# Altium PCB BOARD.PcbDoc (part 1 of 2)
Units mm, origin at the board's own origin, x right, y up, seen from the top; angles counter-clockwise.
Board outline 55 x 60 mm, 2 copper layers (Top Layer, Bottom Layer), stack 1.18 mm thick; 81 components, 77 nets, 348 pads, 271 vias.
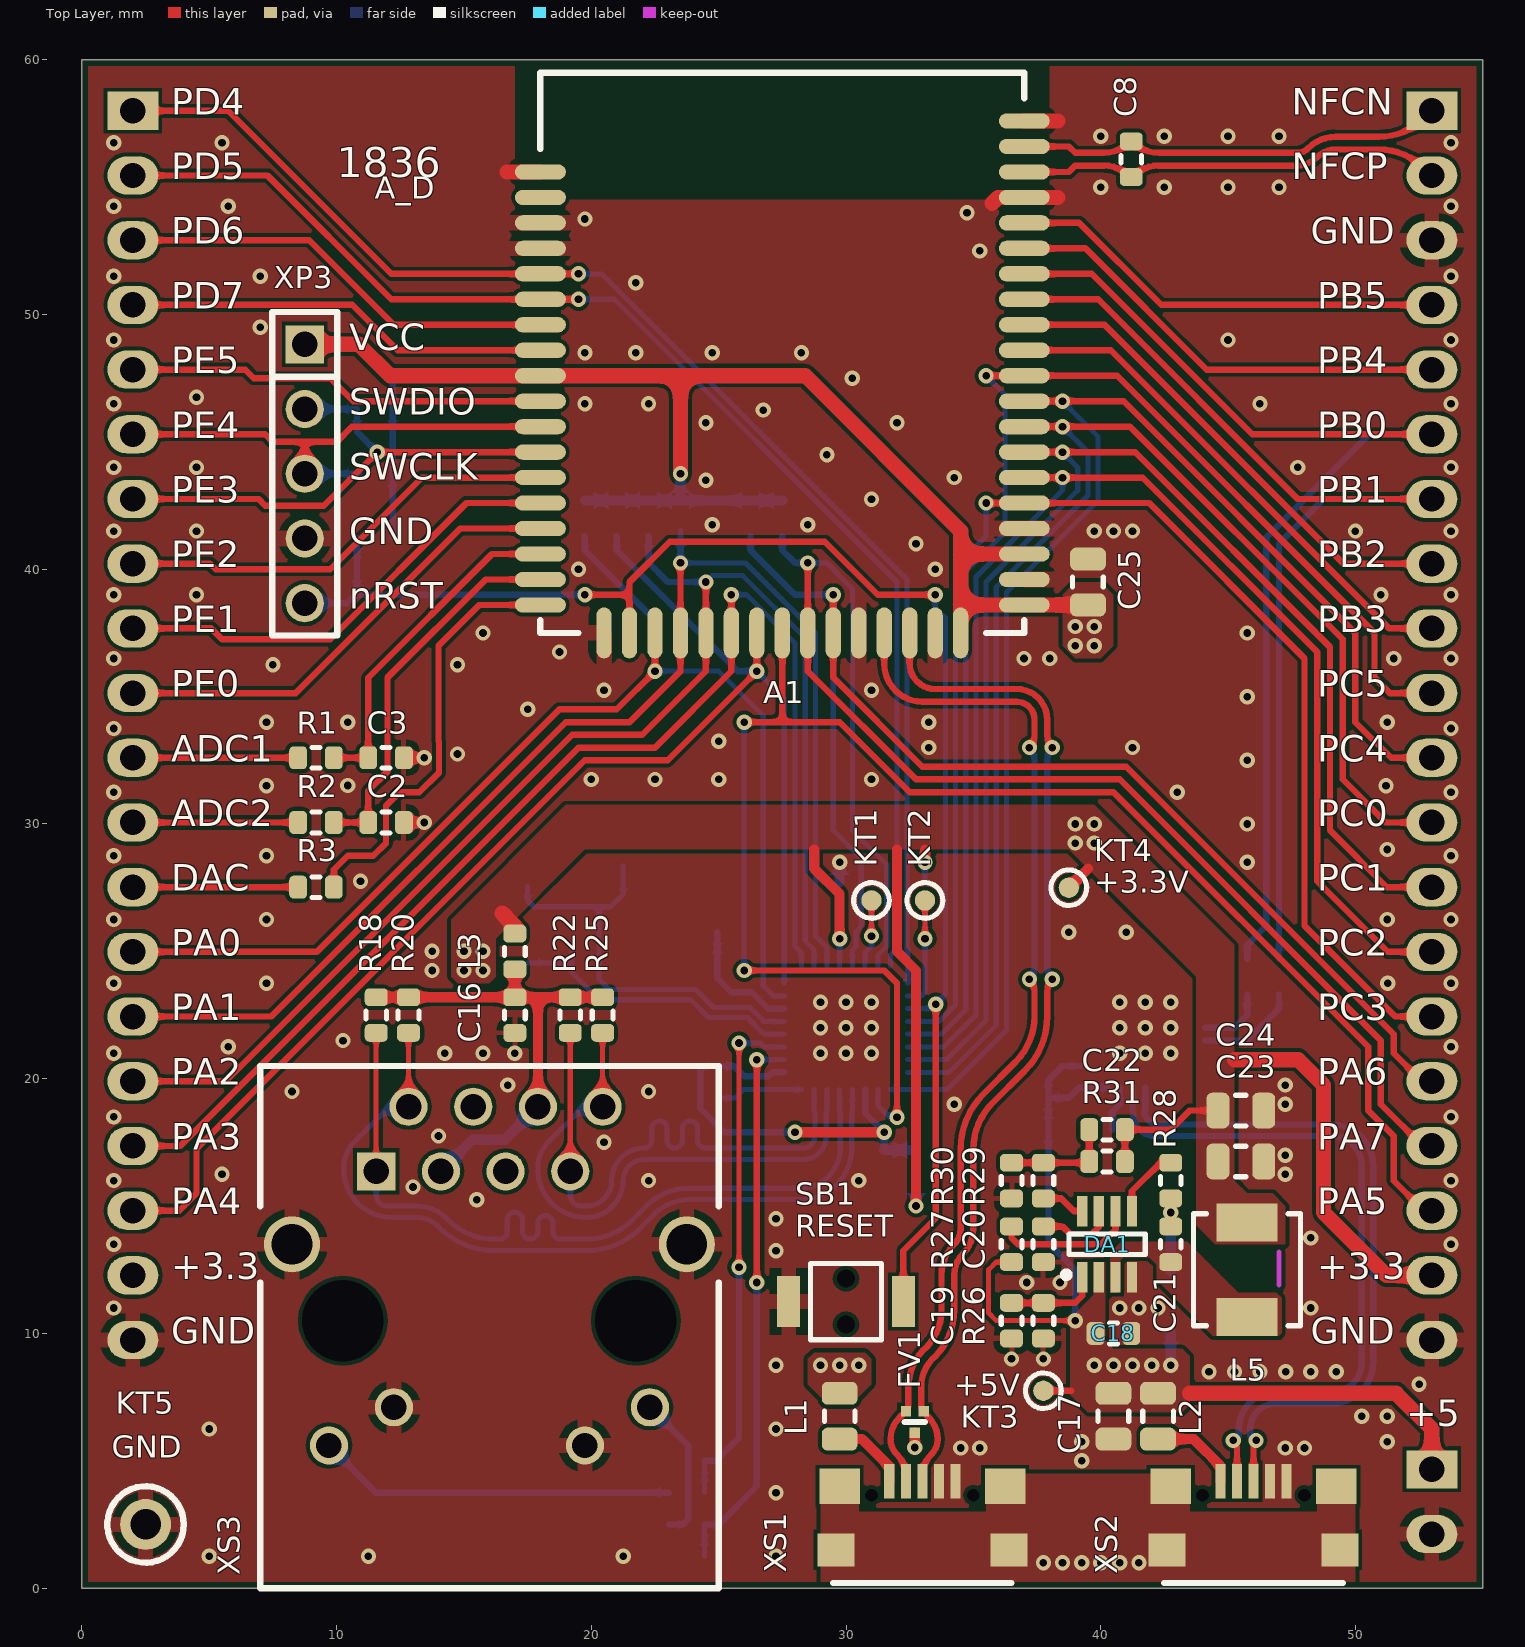
[diagram p0: Top Layer view]
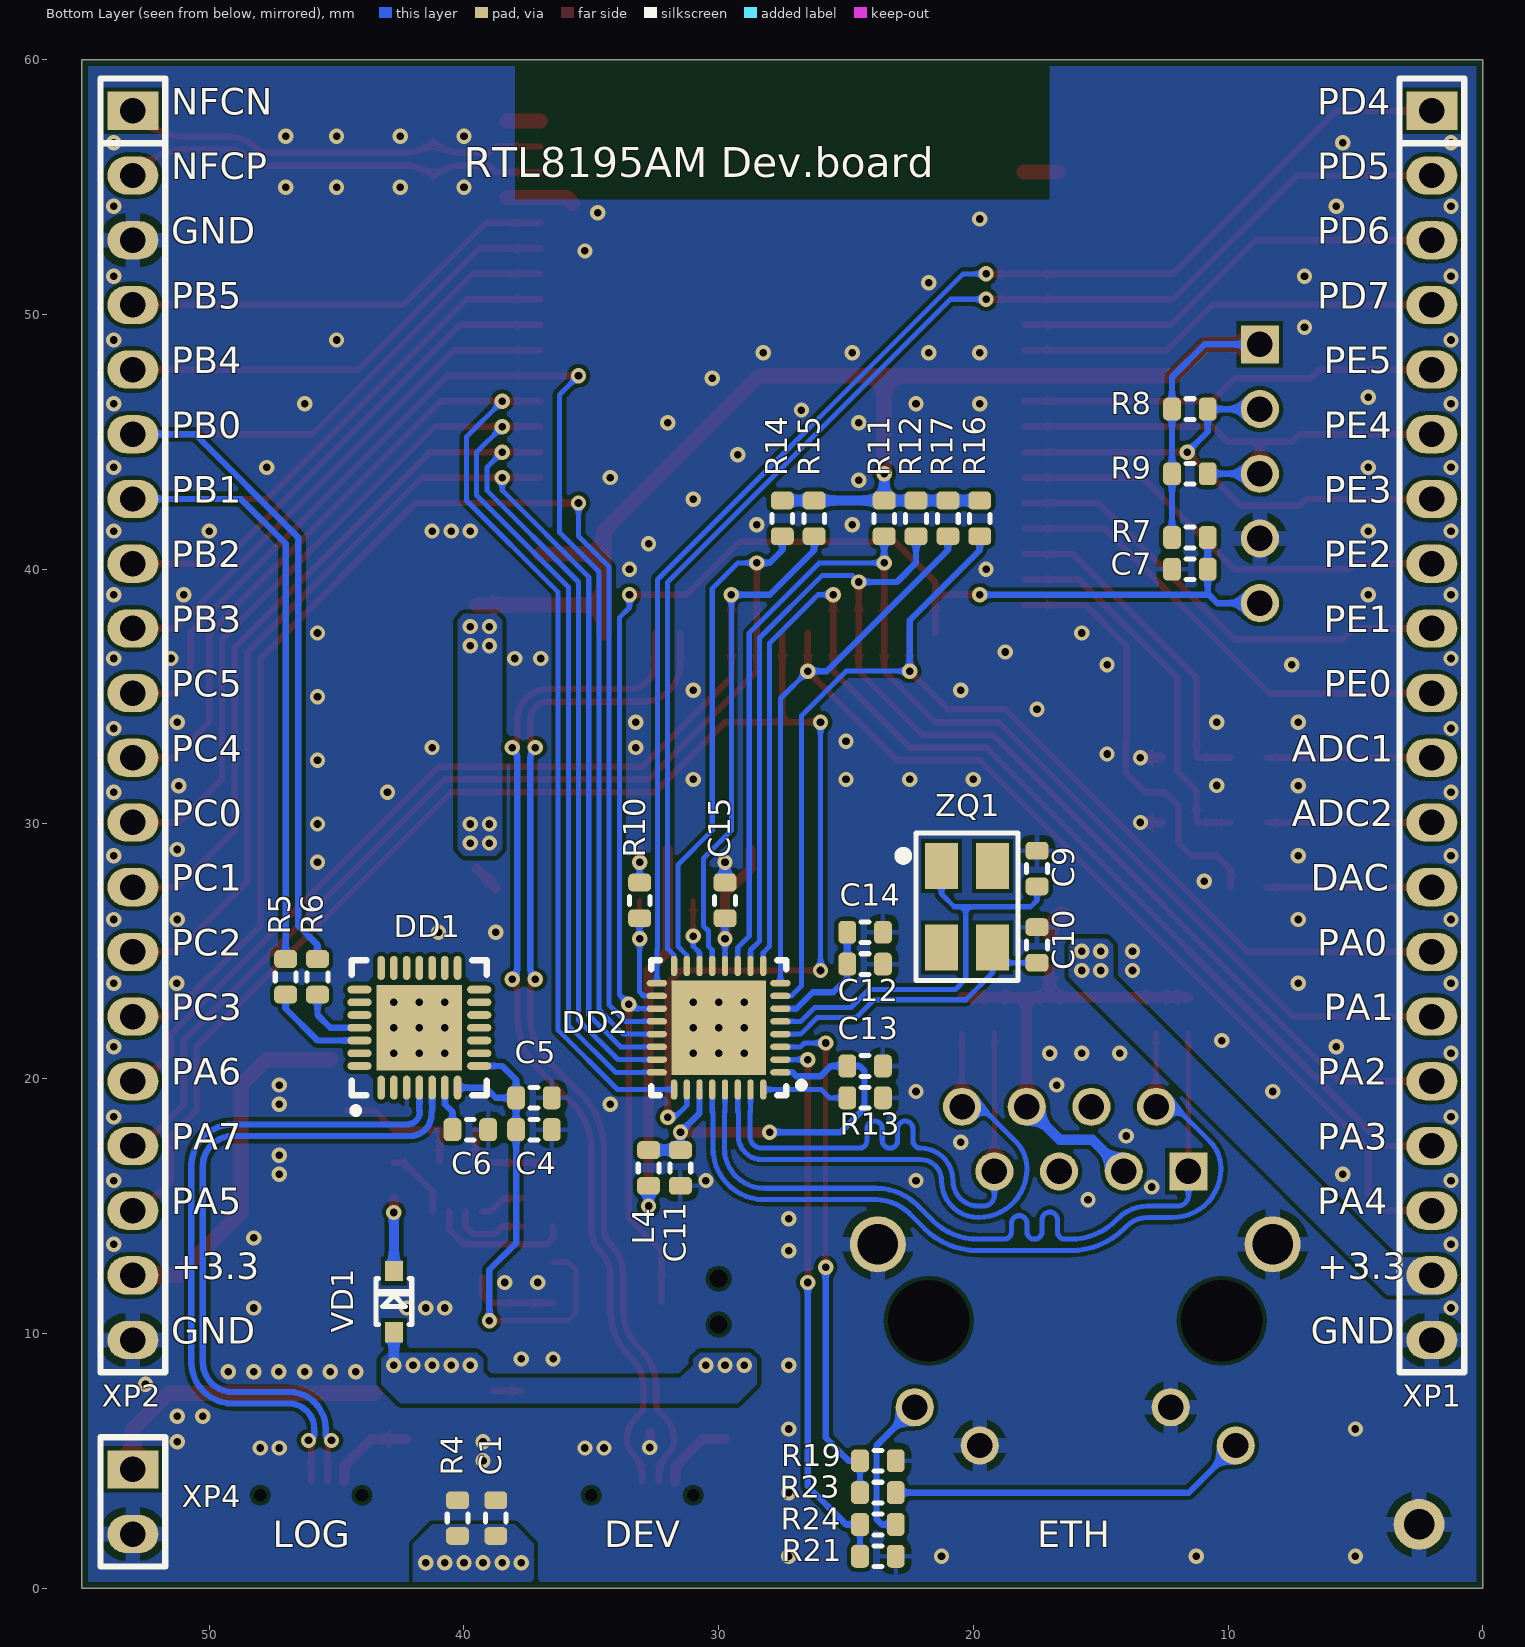
[diagram p1: Bottom Layer view, seen from below]

## Layer stack, top to bottom
Top Solder: solder mask 0.01, Solder Resist, Dk 3.5
Top Layer: signal copper 0.03
Dielectric1: core 1.12, FR-4, Dk 4.2
Bottom Layer: signal copper 0.03
Bottom Solder: solder mask 0.01, Solder Resist, Dk 3.5

## Board outline
0,0 55,0 55,60 0,60

## Design rules (kind name [scope] priority, off if disabled: settings)
BoardOutlineClearance [All] p1: gap=0.25 ignorepadtopadclearanceinfootprint=FALSE
Clearance [All] p1: gap=0.152 ignorepadtopadclearanceinfootprint=FALSE
ComponentClearance [All] p1 off: gap=0.25 collisioncheckmode=3 verticalgap=0.25 showdistances=FALSE
DiffPairsRouting [All] p1: maxlimit=0.4 minlimit=0.15 mostfreqgap=0.25 toplayer_minwidth=0.2 toplayer_maxwidth=0.4 toplayer_prefwidth=0.25 bottomlayer_minwidth=0.2 bottomlayer_maxwidth=0.4 bottomlayer_prefwidth=0.25 maxuncoupledlength=12
Height [All] p1: minheight=0 maxheight=25 prefheight=25
HoleSize [All] p1: absolutevalues=TRUE maxlimit=6 minlimit=0.3 maxpercent=80.000 minpercent=20.000
HoleToHoleClearance [All] p1: gap=0.25 allowstackedmicrovias=TRUE
MatchedLengths "Schematic Matched Net Lengths_6" [InNetClass('SMI')] p1: tolerance=2 checknetsindiffpair=FALSE checkdiffpairvsdiffpair=TRUE checkxsignals=TRUE checkothers=TRUE
MatchedLengths "Schematic Matched Net Lengths_5" [InNetClass('MII')] p2: tolerance=2 checknetsindiffpair=FALSE checkdiffpairvsdiffpair=TRUE checkxsignals=TRUE checkothers=TRUE
MatchedLengths "Schematic Matched Net Lengths_4" [InNetClass('ETH')] p3: tolerance=2 checknetsindiffpair=FALSE checkdiffpairvsdiffpair=TRUE checkxsignals=TRUE checkothers=TRUE
MatchedLengths "Schematic Matched Net Lengths_3" [InNetClass('USBD')] p4: tolerance=1 checknetsindiffpair=TRUE checkdiffpairvsdiffpair=FALSE checkxsignals=FALSE checkothers=FALSE
MatchedLengths "Schematic Matched Net Lengths_2" [InNetClass('USB')] p5: tolerance=1 checknetsindiffpair=TRUE checkdiffpairvsdiffpair=FALSE checkxsignals=FALSE checkothers=FALSE
MatchedLengths "Schematic Matched Net Lengths_1" [InNetClass('NFC')] p6: tolerance=1 checknetsindiffpair=TRUE checkdiffpairvsdiffpair=FALSE checkxsignals=FALSE checkothers=FALSE
MatchedLengths "Schematic Matched Net Lengths" [InNetClass('ETH')] p7: tolerance=1 checknetsindiffpair=TRUE checkdiffpairvsdiffpair=FALSE checkxsignals=FALSE checkothers=FALSE
MinimumSolderMaskSliver [All] p1 off: minsoldermaskwidth=0.254
PlaneClearance [All] p1: clearance=0.5
PlaneConnect [All] p1: planeconnectstyle=Relief reliefexpansion=0.5 reliefentries=4 reliefconductorwidth=0.25 reliefairgap=0.25
PolygonConnect "Schematic Polygon Connect Style_3" [InNet('VCC3P3')] p1: connectstyle=Direct reliefconductorwidth=0.254 reliefentries=4 polygonreliefangle="45 Angle" airgapwidth=0.254
PolygonConnect "Schematic Polygon Connect Style" [InNet('NetC21_2')] p2: connectstyle=Direct reliefconductorwidth=0.254 reliefentries=4 polygonreliefangle="45 Angle" airgapwidth=0.254
PolygonConnect "Schematic Polygon Connect Style_1" [InNet('EARTH')] p3: connectstyle=Direct reliefconductorwidth=0.254 reliefentries=4 polygonreliefangle="45 Angle" airgapwidth=0.254
PolygonConnect PolygonConnect_DirectConnect [InComponentClass('DirectConnect')] p4: connectstyle=Direct reliefconductorwidth=0.254 reliefentries=4 polygonreliefangle="90 Angle" airgapwidth=0.254
PolygonConnect PolygonConnect_Components [InComponent('C*') OR InComponent('R*') OR InComponent('NR*') OR InComponent('DA*') OR InComponent('DD*') OR InComponent('HL*')] p5: connectstyle=Relief reliefconductorwidth=0.2 reliefentries=4 polygonreliefangle="90 Angle" airgapwidth=0.25
PolygonConnect PolygonConnect_Connectors [All vs (InPadClass('All Pads'))] p6: connectstyle=Relief reliefconductorwidth=0.6 reliefentries=4 polygonreliefangle="90 Angle" airgapwidth=0.3
PolygonConnect PolygonConnect_Via [All] p7: connectstyle=Direct reliefconductorwidth=0.254 reliefentries=4 polygonreliefangle="90 Angle" airgapwidth=0.254
RoutingCorners [All] p1: cornerstyle=45-Degree minsetback=1.5 maxsetback=3.5
RoutingVias [All] p1: holewidth=0.6 width=1.2 viastyle="Through Hole" minholewidth=0.3 minwidth=0.6 maxholewidth=1 maxwidth=2
SMDEntry [All] p1: side=TRUE corner=TRUE anyangle=TRUE
SilkToSilkClearance [All] p1 off: silktosilkclearance=0.254
SilkToSolderMaskClearance [IsPad] p1 off: minsilkscreentomaskgap=0.254 clearancetoexposedcopper=TRUE
SolderMaskExpansion [All] p1: expansion=0.1
Width [All] p1: maxlimit=8 minlimit=0.2 preferedwidth=0.6
Width Width_TrackEnds [All] p2 off: maxlimit=0.25 minlimit=0.25 preferedwidth=0.25 checkconnectedcopper=TRUE
19 further rules are at their usual default settings.

## Classes and differential pairs
component class DirectConnect: C1 C17 C18 C23 C24 C25 DA1 L1 L2 L5 R4 XS1 XS2
net class USB: USB_N USB_P
net class USBD: USBD_N USBD_P
net class SMI: PD4 PD5
net class NFC: NFC_N NFC_P
net class MII: ETH_CRS ETH_nINT PA0 PA1 PA2 PA3 PA4 PA5 PA6 PA7 PC0 PC1 PC2 PC3 PC4 PC5
net class ETH: RX_N RX_P TX_N TX_P
differential pair TX: +TX_P -TX_N
differential pair RX: +RX_P -RX_N
differential pair USBD: +USBD_P -USBD_N
differential pair USB: +USB_P -USB_N
differential pair NFC: +NFC_P -NFC_N

## Components (designator, comment, footprint, x,y, rotation, side; value= is the part's Value field where it differs from the comment)
A1 "AMB-02" AMB-02 27.5,48 r0 top locked value=MJIOT-AMB-02
C1 "Capacitor" C0603_L 38.75,2.75 r270 bottom value=0.1uF
C2 "Capacitor" C0603_L 11.941,30.06 r180 top value=100pF
C3 "Capacitor" C0603_L 11.941,32.6 r180 top value=100pF
C4 "Capacitor" C0603_L 37.25,18 r0 bottom value=1uF
C5 "Capacitor" C0603_L 37.25,19.25 r0 bottom value=0.1uF
C6 "Capacitor" C0603_L 39.75,18 r0 bottom value=0.1uF
C7 "Capacitor" C0603_L 11.5,40 r180 bottom value=0.1uF
C8 "Capacitor" C0603_L 41.2,56.1 r90 top value=8.2pF
C9 "Capacitor" C0603_L 17.5,28.25 r270 bottom value=12pF
C10 "Capacitor" C0603_L 17.5,25.25 r270 bottom value=12pF
C11 "Capacitor" C0603_L 31.5,16.5 r90 bottom value=0.1uF
C12 "Capacitor" C0603_L 24.25,24.5 r0 bottom value=1uF
C13 "Capacitor" C0603_L 24.25,20.5 r0 bottom value=0.1uF
C14 "Capacitor" C0603_L 24.25,25.75 r0 bottom value=470pF
C15 "Capacitor" C0603_L 29.75,27 r270 bottom value=0.1uF
C16 "Capacitor" C0603_L 17,22.498 r270 top value=0.1uF
C17 "Capacitor" C0805_L 40.5,6.75 r90 top value=22uF
C18 "Capacitor" C0603_L 40.5,10 r180 top value=0.1uF
C19 "Capacitor" C0603_L 36.5,10.5 r90 top value=1000pF
C20 "Capacitor" C0603_L 37.75,13.5 r90 top value=0.1uF
C21 "Capacitor" C0603_L 42.75,13.5 r270 top value=0.1uF
C22 "Capacitor" C0603_L 40.25,18 r0 top value=33pF
C23 "Capacitor" C0805_L 45.5,16.75 r180 top value=22uF
C24 "Capacitor" C0805_L 45.5,18.75 r180 top value=22uF
C25 "Capacitor" C0805_L 39.5,39.5 r270 top value=22uF
DA1 "MP2315GJ" TSOT-23-8_065P290X160X100_N 40.25,13.5 r0 top locked value=MP2315GJ-Z
DD1 "CP2102_9" QFN-28_050P500X500X100_N 41.75,22 r90 bottom locked value=CP2102-GM
DD2 "LAN8710A-Series" QFN-32_050P500X500X085_N 30,22 r0 bottom locked value=LAN8710A-EZC
FV1 "TPD2EUSB30DRT" SOT-3_070P100X080X050_N 32.7,6.522 r180 top
KT1 "Text" TP-SMT-C-0.8mm 31,27 r0 top value=TestPoint-SMT
KT2 "Text" TP-SMT-C-0.8mm 33.1,27 r90 top value=TestPoint-SMT
KT3 "+5V" TP-SMT-C-0.8mm 37.75,7.75 r90 top value=TestPoint-SMT
KT4 "+3.3V" TP-SMT-C-0.8mm 38.75,27.5 r90 top value=TestPoint-SMT
KT5 "GND" 5001 2.5,2.5 r0 top locked value=5001
L1 "FerriteBead" L0805_L 29.75,6.75 r90 top value=BLM21PG331SN1
L2 "FerriteBead" L0805_L 42.25,6.75 r90 top value=BLM21PG331SN1
L3 "FerriteBead" L0603_L 17,25 r270 top value=BLM18PG331SN1
L4 "FerriteBead" L0603_L 32.75,16.5 r270 bottom value=BLM18PG331SN1
L5 "Coil" SRP4020TA-Series 45.75,12.5 r90 top value=SRP4020TA-4R7M
R1 "Resistor" R0603_L 9.191,32.6 r0 top value=100
R2 "Resistor" R0603_L 9.191,30.06 r0 top value=100
R3 "Resistor" R0603_L 9.191,27.52 r0 top value=0
R4 "Resistor" R0603_L 40.25,2.75 r90 bottom value=100k
R5 "Resistor" R0603_L 47,24 r90 bottom value=1k
R6 "Resistor" R0603_L 45.75,24 r90 bottom value=1k
R7 "Resistor" R0603_L 11.5,41.25 r0 bottom value=10k
R8 "Resistor" R0603_L 11.5,46.29 r0 bottom value=10k
R9 "Resistor" R0603_L 11.5,43.75 r0 bottom value=10k
R10 "Resistor" R0603_L 33.1,27 r90 bottom value=10k
R11 "Resistor" R0603_L 23.5,42 r90 bottom value=10k
R12 "Resistor" R0603_L 22.25,42 r90 bottom value=10k
R13 "Resistor" R0603_L 24.25,19.25 r0 bottom value=12k
R14 "Resistor" R0603_L 27.5,42 r90 bottom value=10k
R15 "Resistor" R0603_L 26.25,42 r90 bottom value=10k
R16 "Resistor" R0603_L 19.75,42 r90 bottom value=10k
R17 "Resistor" R0603_L 21,42 r90 bottom value=10k
R18 "Resistor" R0603_L 11.555,22.5 r90 top value=49.9
R19 "Resistor" R0603_L 23.75,5 r0 bottom value=10k
R20 "Resistor" R0603_L 12.825,22.5 r90 top value=49.9
R21 "Resistor" R0603_L 23.75,1.25 r0 bottom value=10k
R22 "Resistor" R0603_L 19.175,22.5 r90 top value=49.9
R23 "Resistor" R0603_L 23.75,3.75 r180 bottom value=270
R24 "Resistor" R0603_L 23.75,2.5 r180 bottom value=270
R25 "Resistor" R0603_L 20.445,22.5 r90 top value=49.9
R26 "Resistor" R0603_L 37.75,10.5 r90 top value=63.4k
R27 "Resistor" R0603_L 36.5,13.5 r90 top value=100k
R28 "Resistor" R0603_L 42.75,16 r270 top value=20
R29 "Resistor" R0603_L 37.75,16 r90 top value=33k
R30 "Resistor" R0603_L 36.5,16 r90 top value=12.7k
R31 "Resistor" R0603_L 40.25,16.75 r0 top value=40.2k
SB1 "RESET" IT-1185AP 30,11.25 r270 top locked value=IT-1185AP
VD1 "Diode" SOD-323 42.75,11.25 r90 bottom value=1N4148WS-7-F
XP1 "Text" PLS-20 2,33.87 r270 bottom locked value=PLS-20
XP2 "Text" PLS-20 53,33.87 r270 bottom locked value=PLS-20
XP3 "Text" PLS-5 8.75,43.75 r270 top value=PLS-5
XP4 "Text" PLS-2 53,3.39 r270 bottom locked value=PLS-2
XS1 "Text" 1981568-1 33,1.75 r0 top locked value=1981568-1
XS2 "Text" 1981568-1 46,1.75 r0 top locked value=1981568-1
XS3 "Text" SK02-111006NL 16,10 r0 top locked value=SK02-111006NL
ZQ1 "Crystal" "SMD 5x3.2mm" 20.25,26.75 r270 bottom value=AB-25.000MAGE-T

## Footprints (in the part's own frame and the unit in brackets; to place one, negate y for a bottom-side part, rotate by r counter-clockwise, add the part's x,y. Pads: shape width x height; smd on the part's side, far side on the other; paste and mask are expansions set on the pad)
5001 [mm] "Keystone Test Point"
  round 2 hole 1.2: 1(0,0)
  silkscreen extent -1.5,-1.5 1.5,1.5, body extent -1.27,-1.27 1.27,1.27, height 4.9
1981568-1 [mm]
  round 0 hole 0.5 unplated: 0(-2,1.9) 0(2,1.9)
  rect 0.4x1.35 smd: 1(-1.3,2.45) 2(-0.65,2.45) 3(0,2.45) 4(0.65,2.45) 5(1.3,2.45)
  rect 1.45x1.3 smd: 6(-3.4,-0.25) 6(3.4,-0.25)
  rect 1.6x1.4 smd: 6(-3.25,2.25) 6(3.25,2.25)
  silkscreen extent -3.5,-1.55 3.5,-1.55, body extent -4,-2.95 4,2.65, height 2.79
AMB-02 [mm] "Wi-Fi Module on RTL8195AM"
  oval 2x0.6 smd: 1(-9.5,7.6) 2(-9.5,6.6) 3(-9.5,5.6) 4(-9.5,4.6) 5(-9.5,3.6) 6(-9.5,2.6) 7(-9.5,1.6) 8(-9.5,0.6) 9(-9.5,-0.4) 10(-9.5,-1.4) 11(-9.5,-2.4) 12(-9.5,-3.4) 13(-9.5,-4.4) 14(-9.5,-5.4) 15(-9.5,-6.4) 16(-9.5,-7.4) 17(-9.5,-8.4) 18(-9.5,-9.4) 34(9.5,-9.4) 35(9.5,-8.4) 36(9.5,-7.4) 37(9.5,-6.4) 38(9.5,-5.4) 39(9.5,-4.4) 40(9.5,-3.4) 41(9.5,-2.4) 42(9.5,-1.4) 43(9.5,-0.4) 44(9.5,0.6) 45(9.5,1.6) 46(9.5,2.6) 47(9.5,3.6) 48(9.5,4.6) 49(9.5,5.6) 50(9.5,6.6) 51(9.5,7.6) 52(9.5,8.6) 53(9.5,9.6)
  oval 0.6x2 smd: 19(-7,-10.5) 20(-6,-10.5) 21(-5,-10.5) 22(-4,-10.5) 23(-3,-10.5) 24(-2,-10.5) 25(-1,-10.5) 26(0,-10.5) 27(1,-10.5) 28(2,-10.5) 29(3,-10.5) 30(4,-10.5) 31(5,-10.5) 32(6,-10.5) 33(7,-10.5)
  Top Layer pour cut-out: 10.5,6.5 10.5,12 -10.5,12 -10.5,6.5
  Bottom Layer pour cut-out: 10.5,6.5 10.5,12 -10.5,12 -10.5,6.5
  silkscreen extent -9.5,-10.5 9.5,11.5, body extent -9.5,-10.5 9.5,11.5, height 0.8
C0603_L [mm] "Chip Capacitor; Body 1.6 x 0.8 mm (LxW typ)"
  rrect50% 0.7x0.9 smd: 1(-0.7,0) 2(0.7,0)
  silkscreen extent -0.15,-0.41 0.15,0.41, body extent -0.8,-0.4 0.8,0.4, height 0.91
C0805_L [mm] "Chip Capacitor; Body 2.0 x 1.2 mm (LxW typ)"
  rrect50% 0.9x1.4 smd: 1(-0.9,0) 2(0.9,0)
  silkscreen extent -0.2,-0.6 0.2,0.6, body extent -1,-0.62 1,0.63, height 1.01
IT-1185AP [mm]
  rect 2x0.9 smd: 1(0,2.25) 2(0,-2.25)
  round 0.1 hole 0.7 unplated: 4(-0.9,0) 4(0.9,0)
  silkscreen extent -1.5,-1.4 1.5,1.4, body extent -1.45,-2.45 1.45,2.45, height 2.04
L0603_L [mm] "Chip Coil; Body 1.6 x 0.8 mm (LxW typ)"
  rrect50% 0.7x0.9 smd: 1(-0.7,0) 2(0.7,0)
  silkscreen extent -0.15,-0.41 0.15,0.41, body extent -0.8,-0.48 0.8,0.47, height 0.8
L0805_L [mm] "Chip Coil; Body 2.0 x 1.2 mm (LxW typ)"
  rrect50% 0.9x1.4 smd: 1(-0.9,0) 2(0.9,0)
  silkscreen extent -0.2,-0.6 0.2,0.6, body extent -0.97,-0.65 1.03,0.65, height 1.2
PLS-2 [mm]
  rect 1.5x2 hole 1: 1(-1.27,0)
  oval 1.5x2 hole 1: 2(1.27,0)
  silkscreen extent -2.54,-1.27 2.54,1.27, body extent -2.54,-1.27 2.54,1.27, height 8.9
PLS-5 [mm]
  rect 1.5x1.5 hole 1: 1(-5.08,0)
  round 1.5 hole 1: 2(-2.54,0) 3(0,0) 4(2.54,0) 5(5.08,0)
  silkscreen extent -6.35,-1.27 6.35,1.27, body extent -6.35,-1.27 6.35,1.27, height 8.9
PLS-20 [mm]
  rect 1.5x2 hole 1: 1(-24.13,0)
  oval 1.5x2 hole 1: 2(-21.59,0) 3(-19.05,0) 4(-16.51,0) 5(-13.97,0) 6(-11.43,0) 7(-8.89,0) 8(-6.35,0) 9(-3.81,0) 10(-1.27,0) 11(1.27,0) 12(3.81,0) 13(6.35,0) 14(8.89,0) 15(11.43,0) 16(13.97,0) 17(16.51,0) 18(19.05,0) 19(21.59,0) 20(24.13,0)
  silkscreen extent -25.4,-1.27 25.4,1.27, body extent -25.4,-1.27 25.4,1.27, height 8.9
QFN-28_050P500X500X100_N [mm] "QFN, 28-Leads, Body 5,00x5,00mm, Pitch 0,50mm, Thermal Pad 3,35x3,35mm, IPC Medium Density"
  oval 0.95x0.3 smd: 1(-2.35,1.5) 2(-2.35,1) 3(-2.35,0.5) 4(-2.35,0) 5(-2.35,-0.5) 6(-2.35,-1) 7(-2.35,-1.5) 15(2.35,-1.5) 16(2.35,-1) 17(2.35,-0.5) 18(2.35,0) 19(2.35,0.5) 20(2.35,1) 21(2.35,1.5)
  oval 0.3x0.95 smd: 8(-1.5,-2.35) 9(-1,-2.35) 10(-0.5,-2.35) 11(0,-2.35) 12(0.5,-2.35) 13(1,-2.35) 14(1.5,-2.35) 22(1.5,2.35) 23(1,2.35) 24(0.5,2.35) 25(0,2.35) 26(-0.5,2.35) 27(-1,2.35) 28(-1.5,2.35)
  rect 3.35x3.35 smd: TP(0,0)
  silkscreen extent -3.37,-2.65 2.65,2.65, body extent -2.55,-2.55 2.55,2.55, height 1
QFN-32_050P500X500X085_N [mm] "QFN, 32-Leads, Body 5,00x5,00mm, Pitch 0,50mm, Thermal Pad 3,70x3,70mm, IPC Medium Density"
  oval 0.8x0.25 smd: 1(-2.425,1.75) 2(-2.425,1.25) 3(-2.425,0.75) 4(-2.425,0.25) 5(-2.425,-0.25) 6(-2.425,-0.75) 7(-2.425,-1.25) 8(-2.425,-1.75) 17(2.425,-1.75) 18(2.425,-1.25) 19(2.425,-0.75) 20(2.425,-0.25) 21(2.425,0.25) 22(2.425,0.75) 23(2.425,1.25) 24(2.425,1.75)
  oval 0.25x0.8 smd: 9(-1.75,-2.425) 10(-1.25,-2.425) 11(-0.75,-2.425) 12(-0.25,-2.425) 13(0.25,-2.425) 14(0.75,-2.425) 15(1.25,-2.425) 16(1.75,-2.425) 25(1.75,2.425) 26(1.25,2.425) 27(0.75,2.425) 28(0.25,2.425) 29(-0.25,2.425) 30(-0.75,2.425) 31(-1.25,2.425) 32(-1.75,2.425)
  rect 3.7x3.7 smd: TP(0,0)
  silkscreen extent -3.37,-2.65 2.65,2.65, body extent -2.55,-2.55 2.55,2.55, height 0.85
R0603_L [mm] "Chip Resistor; Body 1.6 x 0.8 mm (LxW typ)"
  rrect50% 0.7x0.9 smd: 1(-0.7,0) 2(0.7,0)
  silkscreen extent -0.15,-0.41 0.15,0.41, body extent -0.8,-0.41 0.8,0.41, height 0.46
SK02-111006NL [mm]
  round 0.1 hole 3.2 unplated: 0(-5.75,0.5) 0(5.75,0.5)
  rect 1.5x1.5 hole 1: 1(-4.445,6.36)
  round 1.5 hole 1: 2(-3.175,8.9) 3(-1.905,6.36) 4(-0.635,8.9) 5(0.635,6.36) 6(1.905,8.9) 7(3.175,6.36) 8(4.445,8.9) 9(-6.3,-4.4) 10(-3.75,-2.9) 11(3.75,-4.4) 12(6.3,-2.9)
  round 2.2 hole 1.6: CASE(-7.75,3.5) CASE(7.75,3.5)
  silkscreen extent -9,-10 9,10.5, body extent -8.13,-10.91 8.13,10.68, height 14.36
"SMD 5x3.2mm" [mm]
  rect 1.8x1.3 smd: 1(-1.6,-1) 2(1.6,-1) 3(1.6,1) 4(-1.6,1)
  silkscreen extent -2.9,-2.6 2.9,2, body extent -2.5,-1.6 2.5,1.6, height 1.01
SOD-323 [mm]
  rect 0.8x0.7 smd: 1(-1.2,0) 2(1.2,0)
  silkscreen extent -0.9,-0.7 0.9,0.7, body extent -1.3,-0.67 1.3,0.68, height 1.1
SOT-3_070P100X080X050_N [mm]
  rect 0.4x0.4 smd mask+0.05: 1(-0.35,-0.425) 2(0,0.425) 3(0.35,-0.425)
  silkscreen extent -0.4,0 0.4,0, body extent -0.5,-0.4 0.5,0.4, height 0.5
SRP4020TA-Series [mm]
  rect 1.5x2.4 smd: 1(-1.85,0) 2(1.85,0)
  silkscreen extent -2.2,-2.1 2.2,2.1, body extent -2.22,-2.03 2.22,2.03, height 1.9
TP-SMT-C-0.8mm [mm]
  round 0.8 smd paste-1: 1(0,0)
  silkscreen extent -0.7,-0.7 0.7,0.7
TSOT-23-8_065P290X160X100_N [mm]
  rect 0.4x1.2 smd: 1(-0.975,-1.3) 2(-0.325,-1.3) 3(0.325,-1.3) 4(0.975,-1.3) 5(0.975,1.3) 6(0.325,1.3) 7(-0.325,1.3) 8(-0.975,1.3)
  silkscreen extent -1.72,-1.32 1.5,0.4, body extent -1.45,-1.41 1.45,1.41, height 1.1

## Part data
A1: library part MJIOT-AMB-02, Manufacturer=MJIOT, Operation Frequency=166MHz, Supply Current=450mA, Working Temperature Max=+85°С, Working Temperature Min=-20°С, Application Category=1, I/O Lines=30, ID=3, Part Number=MJIOT-AMB-02, Published=12.12.2017, Publisher="Andrew Danich", ROM/RAM=1MB/2MB+512KB, Supply Operation=+3.0…3.6V, Supported Interfaces="JTAG, SWD, SPI, I2C, I2S, UART, PWM, PCM, SDIO, NFC, ADC, DAC, USB HS, MII/RMII", Type=Модуль, Wireless Compatibility="802.11 b/g/n"
C1 C5 C6 C7 C11 C13 C15 C16 C18 C20 C21: library part GRM188R72A104KA35D, Dielectric Type=X7R, Manufacturer=Murata, Tolerance=±10%, Voltage=100V, Working Temperature Max=+125°С, Working Temperature Min=-55°С, Application Category=1, ID=232, Part Number=GRM188R72A104KA35D, Published=18.05.2010, Publisher="Andrew Danich", Type=Конденсатор
  C1 C18: ClassName=DirectConnect
C2 C3: library part GCM1885C2A101JA16D, Dielectric Type=NP0, Manufacturer=Murata, Tolerance=±5%, Voltage=100V, Working Temperature Max=+125°С, Working Temperature Min=-55°С, Application Category=1, ID=155, Part Number=GCM1885C2A101JA16D, Published=18.05.2010, Publisher="Andrew Danich", Type=Конденсатор
C4 C12: library part GCM188R71E105KA64D, Dielectric Type=X7R, Manufacturer=Murata, Tolerance=±10%, Voltage=25V, Working Temperature Max=+85°С, Working Temperature Min=-55°С, Application Category=1, ID=134, Part Number=GCM188R71E105KA64D, Published=18.05.2010, Publisher="Andrew Danich", Type=Конденсатор
C8: library part GRM1885C2A8R2DA01D, Dielectric Type=NP0, Manufacturer=Murata, Tolerance=±0.5pF, Voltage=100V, Working Temperature Max=+125°С, Working Temperature Min=-55°С, Application Category=1, ID=215, Part Number=GRM1885C2A8R2DA01D, Published=18.05.2010, Publisher="Andrew Danich", Type=Конденсатор
C9 C10: library part GCM1885C2A120JA16D, Dielectric Type=NP0, Manufacturer=Murata, Tolerance=±5%, Voltage=100V, Working Temperature Max=+125°С, Working Temperature Min=-55°С, Application Category=1, ID=121, Part Number=GCM1885C2A120JA16D, Published=18.05.2010, Publisher="Andrew Danich", Type=Конденсатор
C14: library part GRM1885C1H471FA01D, Dielectric Type=NP0, Manufacturer=Murata, Tolerance=±1%, Voltage=50V, Working Temperature Max=+125°С, Working Temperature Min=-55°С, Application Category=1, ID=137, Part Number=GRM1885C1H471FA01D, Published=18.05.2010, Publisher="Andrew Danich", Type=Конденсатор
C17 C23 C24 C25: library part GRM21BR60J226ME39L, Dielectric Type=X5R, Manufacturer=Murata, Tolerance=±20%, Voltage=6.3V, Working Temperature Max=+85°С, Working Temperature Min=-55°С, Application Category=1, ClassName=DirectConnect, ID=140, Part Number=GRM21BR60J226ME39L, Published=18.05.2010, Publisher="Andrew Danich", Type=Конденсатор
C19: library part GRM1885C2A102JA01D, Dielectric Type=NP0, Manufacturer=Murata, Tolerance=±5%, Voltage=100V, Working Temperature Max=+125°С, Working Temperature Min=-55°С, Application Category=1, ID=135, Part Number=GRM1885C2A102JA01D, Published=18.05.2010, Publisher="Andrew Danich", Type=Конденсатор
C22: library part GRM1885C1H330JA01D, Dielectric Type=NP0, Manufacturer=Murata, Tolerance=±5%, Voltage=50V, Working Temperature Max=+125°С, Working Temperature Min=-55°С, Application Category=1, ID=123, Part Number=GRM1885C1H330JA01D, Published=18.05.2010, Publisher="Andrew Danich", Type=Конденсатор
DA1: library part MP2315GJ-Z, Frequency=500kHz, Input Voltage=+4.5…24V, Manufacturer="Monolithic Power Systems", Output Current=3A, Output Voltage=+0.8…22.8V, Working Temperature Max=+125°С, Working Temperature Min=-40°С, Application Category=1, ClassName=DirectConnect, Functional Analog=MP2315GJ-P, ID=38, Part Number=MP2315GJ-Z, Published=01.09.2018, Publisher="Andrew Danich", Shutdown Input=YES, Type=Микросхема
DD1: library part CP2102-GM, "Single Chip USB to UART Bridge", Manufacturer="Silicon Labs", Supply Current=13.7mA, Working Temperature Max=+85°C, Working Temperature Min=-40°C, Application Category=1, Channels=1, Functional Analog=-, ID=4, Input Interface=UART, OTG Support=No, Part Number=CP2102-GM, Published=03.08.2015, Publisher="Andrew Danich", Supply Operation=+3.3V, Type=Микросхема, USB Speed Support="12 Mb/s", USB Type Support="USB 2.0"
DD2: library part LAN8710A-EZC, Manufacturer=Microchip, Working Temperature Max=+85°С, Working Temperature Min=0°С, Application Category=1, Ethernet Speed=10/100BASE-T, Functional Analog="LAN8710A-EZC-ABC, LAN8710Ai-EZK", ID=5, Interface="MII, RMII", Part Number=LAN8710A-EZC, Published=01.09.2018, Publisher="Andrew Danich", Supply Operation=+3.3V, Type=Микросхема
FV1: Breakdown Voltage=7V, Forward Voltage=0.95V, Junction Capacitance=0.8pF, Manufacturer="Texas Instruments", Peak Forward Current=5A, Pulse Power Dissipation=45W, Reverse Stand Off Voltage=5.5V, Working Temperature Max=+85°С, Working Temperature Min=-40°С, Application Category=1, Directional=Bidirectional, Functional Analog=-, ID=5, Part Number=TPD2EUSB30DRT, Published=27.12.2015, Publisher="Andrew Danich", Type=Супрессор
KT1 KT2 KT3 KT4: library part TestPoint-SMT, Manufacturer=-, Application Category=1, Application Type="On PCB Test Point", Functional Analog=-, ID=6, Part Number=TestPoint-SMT, Published=03.03.2015, Publisher="Andrew Danich"
KT5: library part 5001, Limit Voltage=100V, Manufacturer="Keystone Electronics", Rated Current=0.5A, Application Category=1, Application Type="Miniature THM Test Point", Functional Analog=-, ID=2, Part Number=5001, Published=03.03.2015, Publisher="Andrew Danich"
L1 L2: library part BLM21PG331SN1, DC Resistance=0.07ohm, Inductor Type=EMIFIL, Manufacturer=Murata, Rated Current=1.5A, Working Temperature Max=+125°С, Working Temperature Min=-55°С, Application Category=1, ClassName=DirectConnect, ID=2, Impedance at 100Mhz=330ohm, Part Number=BLM21PG331SN1, Published=14.11.2014, Publisher="Andrew Danich", Type=Дроссель
L3 L4: library part BLM18PG331SN1, DC Resistance=0.15ohm, Inductor Type=EMIFIL, Manufacturer=Murata, Rated Current=1.2A, Working Temperature Max=+125°С, Working Temperature Min=-55°С, Application Category=1, ID=1, Impedance at 100Mhz=330ohm, Part Number=BLM18PG331SN1, Published=14.11.2014, Publisher="Andrew Danich", Type=Дроссель
L5: library part SRP4020TA-4R7M, DC Resistance=0.105ohm, Inductance=4.7uH, Manufacturer=Bourns, Rated Current=2.6A, Self-Resonant Frequency=27MHz, Tolerance=±20%, Working Temperature Max=+125°С, Working Temperature Min=-40°С, Application Category=1, ClassName=DirectConnect, ID=103, Part Number=SRP4020TA-4R7M, Published=20.05.2010, Publisher="Andrew Danich", Q=10, Type=Дроссель
R1 R2: library part RC0603JR-07100R, Limit Voltage=50V, Manufacturer=Yageo, Temperature Coefficient=100ppm, Tolerance=±5%, Total Power Dissipation=0.1W, Working Temperature Max=+155°С, Working Temperature Min=-55°С, Application Category=1, Functional Analog=CR0603-JW-101E, ID=10, Part Number=RC0603JR-07100R, Published=24.03.2010, Publisher="Andrew Danich", Series Type=Thick-Film, Type=Резистор
R3: library part RC0603JR-070R, Limit Voltage=50V, Manufacturer=Yageo, Temperature Coefficient=100ppm, Tolerance=±5%, Total Power Dissipation=0.1W, Working Temperature Max=+155°С, Working Temperature Min=-55°С, Application Category=1, Functional Analog="RC0603FR-070RL, CR0603-J/-000E", ID=5, Part Number=RC0603JR-070R, Published=24.03.2010, Publisher="Andrew Danich", Series Type=Thick-Film, Type=Резистор
R4 R27: library part RC0603JR-07100KL, Limit Voltage=50V, Manufacturer=Yageo, Temperature Coefficient=100ppm, Tolerance=±5%, Total Power Dissipation=0.1W, Working Temperature Max=+155°С, Working Temperature Min=-55°С, Application Category=1, Functional Analog=CR0603-JW-104E, ID=11, Part Number=RC0603JR-07100KL, Published=24.03.2010, Publisher="Andrew Danich", Series Type=Thick-Film, Type=Резистор
  R4: ClassName=DirectConnect
R5 R6: library part RC0603JR-071KL, Limit Voltage=50V, Manufacturer=Yageo, Temperature Coefficient=100ppm, Tolerance=±5%, Total Power Dissipation=0.1W, Working Temperature Max=+155°С, Working Temperature Min=-55°С, Application Category=1, Functional Analog=CR0603-JW-102E, ID=19, Part Number=RC0603JR-071KL, Published=24.03.2010, Publisher="Andrew Danich", Series Type=Thick-Film, Type=Резистор
R7 R8 R9 R10 R11 R12 R14 R15 R16 R17 R19 R21: library part RC0603JR-0710KL, Limit Voltage=50V, Manufacturer=Yageo, Temperature Coefficient=100ppm, Tolerance=±5%, Total Power Dissipation=0.1W, Working Temperature Max=+155°С, Working Temperature Min=-55°С, Application Category=1, Functional Analog=CR0603-JW-103E, ID=12, Part Number=RC0603JR-0710KL, Published=24.03.2010, Publisher="Andrew Danich", Series Type=Thick-Film, Type=Резистор
R13: library part RC0603FR-0712KL, Limit Voltage=50V, Manufacturer=Yageo, Temperature Coefficient=100ppm, Tolerance=±1%, Total Power Dissipation=0.1W, Working Temperature Max=+155°С, Working Temperature Min=-55°С, Application Category=1, ID=323, Part Number=RC0603FR-0712KL, Published=24.03.2010, Publisher="Andrew Danich", Series Type=Thick-Film, Type=Резистор
R18 R20 R22 R25: library part RC0603FR-0749R9L, Limit Voltage=50V, Manufacturer=Yageo, Temperature Coefficient=100ppm, Tolerance=±1%, Total Power Dissipation=0.1W, Working Temperature Max=+155°С, Working Temperature Min=-55°С, Application Category=1, Functional Analog=CR0603-FX-49R9E, ID=249, Part Number=RC0603FR-0749R9L, Published=24.03.2010, Publisher="Andrew Danich", Series Type=Thick-Film, Type=Резистор
R23 R24: library part RC0603JR-07270RL, Limit Voltage=50V, Manufacturer=Yageo, Temperature Coefficient=100ppm, Tolerance=±5%, Total Power Dissipation=0.1W, Working Temperature Max=+155°С, Working Temperature Min=-55°С, Application Category=1, ID=36, Part Number=RC0603JR-07270RL, Published=24.03.2010, Publisher="Andrew Danich", Series Type=Thick-Film, Type=Резистор
R26: library part RC0603FR-0763K4L, Limit Voltage=50V, Manufacturer=Yageo, Temperature Coefficient=100ppm, Tolerance=±1%, Total Power Dissipation=0.1W, Working Temperature Max=+155°С, Working Temperature Min=-55°С, Application Category=1, ID=468, Part Number=RC0603FR-0763K4L, Published=24.03.2010, Publisher="Andrew Danich", Series Type=Thick-Film, Type=Резистор
R28: library part RC0603JR-0720RL, Limit Voltage=50V, Manufacturer=Yageo, Temperature Coefficient=100ppm, Tolerance=±5%, Total Power Dissipation=0.1W, Working Temperature Max=+155°С, Working Temperature Min=-55°С, Application Category=1, ID=469, Part Number=RC0603JR-0720RL, Published=24.03.2010, Publisher="Andrew Danich", Series Type=Thick-Film, Type=Резистор
R29: library part RC0603JR-0733KL, Limit Voltage=50V, Manufacturer=Yageo, Temperature Coefficient=100ppm, Tolerance=±5%, Total Power Dissipation=0.1W, Working Temperature Max=+155°С, Working Temperature Min=-55°С, Application Category=1, ID=47, Part Number=RC0603JR-0733KL, Published=24.03.2010, Publisher="Andrew Danich", Series Type=Thick-Film, Type=Резистор
R30: library part RC0603FR-0712K7L, Limit Voltage=50V, Manufacturer=Yageo, Temperature Coefficient=100ppm, Tolerance=±1%, Total Power Dissipation=0.1W, Working Temperature Max=+155°С, Working Temperature Min=-55°С, Application Category=1, ID=263, Part Number=RC0603FR-0712K7L, Published=24.03.2010, Publisher="Andrew Danich", Series Type=Thick-Film, Type=Резистор
R31: library part RC0603FR-0740K2L, Limit Voltage=50V, Manufacturer=Yageo, Temperature Coefficient=100ppm, Tolerance=±1%, Total Power Dissipation=0.1W, Working Temperature Max=+155°С, Working Temperature Min=-55°С, Application Category=1, ID=294, Part Number=RC0603FR-0740K2L, Published=24.03.2010, Publisher="Andrew Danich", Series Type=Thick-Film, Type=Резистор
SB1: library part IT-1185AP, Isolator Resistance=100meg, Limit Current=50mA, Resistance=0.1ohm, Application Category=1, Backlight=NO, Height=5mm, ID=36, Number of Contacts=2, Part Number=IT-1185AP, Published=17.04.2014, Publisher="Andrew Danich", Type=Переключатель
VD1: library part 1N4148WS-7-F, Capacitance=2pF, Forward Current=150mA, Forward Voltage=1V, Manufacturer="Diodes Incorporated", Reverse Current=1uA, Reverse Voltage=100V, Total Power Dissipation=200mW, Working Temperature Max=+150°С, Working Temperature Min=-55°С, Application Category=1, Functional Analog=1N4148WS, ID=13, Part Number=1N4148WS-7-F, Published=18.05.2010, Publisher="Andrew Danich", Recovery Time=4nS, Type=Диод
XP1 XP2: library part PLS-20, Limit Current=3A, Limit Voltage=250V, Resistance=15momh, Application Category=1, Connector Type=Male, ID=26, Part Number=PLS-20, Pins=20, Pitch=2.54mm, Published=24.08.2015, Publisher="Andrew Danich", Surface Finish=Gold, Type=Вилка
XP3: library part PLS-5, Limit Current=3A, Limit Voltage=250V, Resistance=15momh, Application Category=1, Connector Type=Male, ID=4, Part Number=PLS-5, Pins=5, Pitch=2.54mm, Published=07.03.2013, Publisher="Andrew Danich", Surface Finish=Gold, Type=Вилка
XP4: library part PLS-2, Limit Current=3A, Limit Voltage=250V, Resistance=15momh, Application Category=1, Connector Type=Male, ID=1, Part Number=PLS-2, Pins=2, Pitch=2.54mm, Published=07.03.2013, Publisher="Andrew Danich", Surface Finish=Gold, Type=Вилка
XS1 XS2: library part 1981568-1, Limit Current=1A, Limit Voltage=24V, Manufacturer="TE Connectivity", Application Category=1, ClassName=DirectConnect, Connector Type=Female, ID=30, Interface="USB 2.0", Max Data Rate="480 mbps", Mount Type=Surface, Part Number=1981568-1, Pins=9, Published=11.04.2016, Publisher="Andrew Danich", Type=Розетка
XS3: library part SK02-111006NL, Limit Current=1.5A, Limit Voltage=125V, Manufacturer="Sanken Electric Co., Ltd", Working Temperature Max=+70°С, Working Temperature Min=-40°С, Application Category=1, Connector Type=Female, Functional Analog=-, ID=18, Interface=Ethernet/Int.Trans., Max Data Rate=10/100Mbs, Mount Type="Through hole", Part Number=SK02-111006NL, Pins=12, Published=08.09.2014, Publisher="Andrew Danich", Type=Розетка
ZQ1: library part AB-25.000MAGE-T, Load Capacitance=12pF, Manufacturer="TXC Corporation", Output Frequency=25MHz, Temperature Coefficient=±30ppm, Working Temperature Max=+85°С, Working Temperature Min=-40°С, Application Category=1, ID=26, Part Number=AB-25.000MAGE-T, Published=08.03.2013, Publisher="Andrew Danich", Type=Резонатор

## Via types
v1: diameter 0.6, hole 0.3, Top Layer to Bottom Layer, tented both sides, 271 vias

## Nets (pads, with @x,y where several pads share a name; then routed paths per layer and width w, separated by ;. In a path a pad name is that pad's centre, name@x,y a point inside that pad or via, vN(x,y) a via of type N, cw(c..) or ccw(c..) an arc to the next point about the centre after c; other vN are vias at no path point)
ADC_CH1: A1.16 C3.2 R1.2 | length 13.3
  Top Layer w0.25: R1.2 C3.2 11.241,35.741 16.1,40.6 A1.16
ADC_CH2: A1.17 C2.2 R2.2 | length 14.9
  Top Layer w0.25: R2.2 C2.2 11.241,31.3 12,32.059 12,35.75 15.85,39.6 A1.17
DAC_CH0: A1.18 R3.2 | length 16.9
  Top Layer w0.25: R3.2 9.891,28.2 10.441,28.75 11.441,28.75 11.941,29.25 11.941,30.717 12.474,31.25 13.25,31.25 14.019,32.019 14.019,33.231 14,33.25 14,37 15.6,38.6 A1.18
EARTH: C1.2 R4.1 XS1.6 XS2.6
  other v1: 37.75,1 38.5,1 39.25,1 40,1 40.75,1 41.5,1
ETH_CRS: DD2.14 KT1.1 | length 2.7
  Top Layer w0.2: v1(31,25.6) KT1.1
  Bottom Layer w0.2: DD2.14 30.752,24.427 30.752,24.952 31,25.2 v1(31,25.6)
ETH_nINT: DD2.18 KT2.1 R10.1 | length 5.1
  Top Layer w0.2: v1(33.1,25.5) KT2.1
  Bottom Layer w0.2: DD2.18 32.95,23.25 33.1,23.4 v1(33.1,25.5) R10.1
GND: A1.1 A1.3 A1.4 A1.19 A1.29 A1.32 A1.35 A1.37 A1.50 A1.53 C1.1 C2.1 C3.1 C4.1 C5.1 C6.1 C7.1 C9.1 C10.1 C11.1 C12.1 C13.1 C14.1 C15.1 C16.2 C17.1 C18.1 C19.1 C20.1 C23.1 C24.1 C25.1 DA1.4 DD1.3 DD1.TP DD2.TP FV1.2 KT5.1 R4.2 R13.1 R19.1 R21.1 R26.1 R30.1 SB1.2 XP1.20 XP2.3 XP2.20 XP3.4 XP4.2 XS1.4 XS1.5 XS2.4 XS2.5 XS3.10 XS3.11 XS3.CASE | length 8.3
  Top Layer w0.4: C2.1 v1(13.441,30.06) ; C3.1 v1(13.441,32.6) ; v1(32.7,5.522) FV1.2
  Top Layer w0.6: 16.688,55.6 A1.1 ; 35.735,54.366 35.969,54.6 A1.50 38.312,54.6 ; A1.53 38.312,57.6
  Bottom Layer w0.4: C15.1 v1(29.75,28.5)
  other v1: 5,1.25 11.25,1.25 21.25,1.25 27.25,1.25 27.25,3.75 39.25,5 34.5,5.5 35.25,5.5 47.25,5.5 48,5.5 39.25,5.75 51.25,5.75 5,6.25 27.25,6.25 50.25,6.75 51.25,6.75 52.5,8 44.25,8.5 45.25,8.5 46.25,8.5 47.265,8.5 48.25,8.5 49.25,8.5 27.25,8.75 36.5,9 37.75,9 1.25,11 40.75,11 41.5,11 42.25,11 48.25,11 37.1,12 38.4,12 27.25,13.25 1.25,13.5 53.75,13.5 48.25,13.75 27.25,14.5 15.5,15.25 13,15.75 1.25,16 22.25,16 30.5,16 53.75,16 5.5,16.25 47.25,16.25 47.25,17 20.5,17.5 14,17.75 1.25,18.5 53.75,18.5 34.25,19 47.25,19 8.25,19.5 22.25,19.5 16.725,19.75 47.25,19.75 1.25,21 14.25,21 15.75,21 17,21 29,21 30,21 31,21 40.75,21 41.75,21 42.75,21 5.75,21.25 53.75,21.25 10.25,21.497 29,22 30,22 31,22 40.75,22 41.75,22 42.75,22 29,23 30,23 31,23 40.75,23 41.75,23 42.75,23 1.25,23.75 7.25,23.75 51.27,23.75 53.75,23.75 13.75,24.25 13.75,25 38.75,25.75 41,25.75 1.25,26.25 7.25,26.25 51.25,26.25 53.75,26.25 10.938,27.75 45.75,28.5 1.25,28.75 7.25,28.75 53.75,28.75 51.25,29 45.75,30 1.25,31.25 43,31.25 53.75,31.25 7.25,31.5 51.2,31.5 10.441,31.511 20,31.75 22.5,31.75 25,31.75 31,31.75 45.75,32.5 14.75,32.75 33.25,33 41.25,33 25,33.25 1.25,33.75 53.75,33.75 7.25,34 10.441,34 33.25,34 51.252,34 17.5,34.5 45.75,35 20.5,35.25 31,35.25 7.5,36.25 14.75,36.25 1.25,36.5 36.99,36.5 38,36.5 51.5,36.5 53.75,36.5 18.75,36.75 15.75,37.5 45.75,37.5 1.25,39 4.5,39 51,39 53.75,39 19.5,40 33.5,40 32.75,41 1.25,41.5 4.5,41.5 39.75,41.5 40.5,41.5 41.25,41.5 50,41.5 53.75,41.5 24.75,41.75 28.5,41.75 31,42.75 24.5,43.5 34.25,43.6 1.25,44 4.5,44 47.74,44 53.75,44 29.25,44.5 24.5,45.75 32,45.75 26.75,46.25 1.25,46.5 19.75,46.5 22.25,46.5 46.25,46.5 53.75,46.5 4.5,46.75 30.25,47.5 19.75,48.5 21.75,48.5 24.75,48.5 28.25,48.5 1.25,49 45,49 53.75,49 7,49.5 21.75,51.25 1.25,51.5 7,51.5 53.75,51.5 35.25,52.5 19.75,53.75 34.75,54 1.25,54.25 5.75,54.25 53.75,54.25 40,55 42.5,55 45,55 47,55 1.25,56.75 5.5,56.75 53.75,56.75 40,57 42.5,57 45,57 47,57
LED1: DD2.3 R19.2 R23.1 | length 20.3
  Top Layer w0.2: v1(25.8,12.6) v1(25.8,21.4)
  Bottom Layer w0.2: R23.1 R19.2 ; v1(25.8,21.4) 26.631,21.4 26.781,21.25 DD2.3
  Bottom Layer w0.25: R19.2 24.9,5 25.8,5.9 v1(25.8,12.6)
LED2: DD2.2 R21.2 R24.1 | length 21.7
  Top Layer w0.25: v1(26.5,12) v1(26.5,20.75)
  Bottom Layer w0.2: R21.2 R24.1 ; v1(26.5,20.75) DD2.2
  Bottom Layer w0.25: R24.1 25,2.5 26.5,4 v1(26.5,12)
NetC6_2: C6.2 DD1.6 | length 1.8
  Bottom Layer w0.25: C6.2 40.45,18.7 40.75,19 DD1.6
NetC9_2: C9.2 DD2.5 ZQ1.1 | length 16.5
  Bottom Layer w0.2: C9.2 17.5,27 17.75,26.75 20.3,26.75 ; ZQ1.1 21.25,27.25 20.75,26.75 20.3,26.75 ; DD2.5 26.781,22.25 26.231,22.8 24.8,22.8 24.1,23.5 20.7,23.5 20.3,23.9 20.3,26.75
NetC10_2: C10.2 DD2.4 ZQ1.3 | length 12.1
  Bottom Layer w0.2: C10.2 19.15,24.55 ZQ1.3@19.25,24.65 ; ZQ1.3 ZQ1.3@19.25,24.65 ; DD2.4 26.78,21.75 26.13,22.4 24.6,22.4 23.9,23.1 20.3,23.1 19.25,24.15 ZQ1.3@19.25,24.65
NetC11_2: C11.2 C13.2 DD2.1 DD2.27 L4.1 | length 16.6
  Top Layer w0.4: v1(28,17.9) v1(31.5,17.9)
  Bottom Layer w0.25: DD2.1 27.1,20.25 26.95,20.1 26,20.1 25.6,20.5 C13.2 24.467,20.5 24.273,20.307 24.273,18.837 25.21,17.9 v1(28,17.9) ; DD2.27 30.75,18.65 v1(31.5,17.9) C11.2
  Bottom Layer w0.4: C11.2 L4.1
NetC12_2: C12.2 C14.2 DD2.6 | length 4.9
  Bottom Layer w0.25: C14.2 C12.2 24.95,23.95 25.5,23.4 26.3,23.4 26.95,22.75 DD2.6
NetC16_1: C16.1 L3.2 R18.2 R20.2 R22.2 R25.2 XS3.3 XS3.6 | length 19.2
  Top Layer w0.4: R18.2 R20.2 C16.1@17,23.2 ; C16.1 C16.1@17,23.2 ; L3.2 C16.1@17,23.2 ; XS3.6 17.905,23.2 ; R25.2 R22.2 17.905,23.2 ; C16.1@17,23.2 17.905,23.2
  Bottom Layer w0.4: XS3.3 15.335,17.6 16.605,17.6 XS3.6
NetC19_2: C19.2 DA1.1 R26.2 | length 3.6
  Top Layer w0.25: C19.2 R26.2 39,11.2 39.275,11.475 DA1.1
NetC20_2: C20.2 DA1.7 | length 3
  Top Layer w0.25: C20.2 38.5,14.2 38.798,13.902 39.652,13.902 39.925,14.175 DA1.7
NetC21_1: C21.1 R28.2 VD1.2 | length 3.4
  Top Layer w0.4: C21.1 v1(42.75,14.75) R28.2
  Bottom Layer w0.4: VD1.2 v1(42.75,14.75)
NetC21_2: C21.2 DA1.3 L5.1
NetC22_1: C22.1 R29.2 R30.2 R31.1 | length 4.3
  Top Layer w0.25: R30.2 R29.2 39.5,16.7 R31.1 C22.1
NetDA1_5: DA1.5 R28.1 | length 2.8
  Top Layer w0.25: DA1.5 41.225,15.575 42.35,16.7 R28.1
NetDA1_6: DA1.6 R27.2 | length 5.6
  Top Layer w0.25: R27.2 36.5,13.75 36.75,13.5 40,13.5 40.575,14.075 DA1.6
NetDA1_8: DA1.8 R29.1 | length 1.7
  Top Layer w0.25: R29.1 38.45,15.3 38.95,14.8 DA1.8
NetDD1_25: DD1.25 R6.1 | length 2.7
  Bottom Layer w0.25: DD1.25 45.25,22 45.75,22.5 R6.1
NetDD1_26: DD1.26 R5.1 | length 4
  Bottom Layer w0.25: DD1.26 45.75,21.5 47,22.75 R5.1
NetDD2_32: DD2.32 R13.2 | length 3.4
  Bottom Layer w0.2: R13.2 25.65,19.25 25.975,19.575 DD2.32
NetL1_1: L1.1 XS1.1 | length 3
  Top Layer w0.4: L1.1 30.631,5.85 31.7,4.781 XS1.1
NetL2_1: L2.1 XS2.1 | length 3.5
  Top Layer w0.4: L2.1 43.65,5.85 44.7,4.8 XS2.1
NetR1_1: R1.1 XP1.11 | length 6.5
  Top Layer w0.25: XP1.11 R1.1
NetR2_1: R2.1 XP1.12 | length 6.5
  Top Layer w0.25: XP1.12 R2.1
NetR3_1: R3.1 XP1.13 | length 6.5
  Top Layer w0.25: XP1.13 R3.1
NetR23_2: R23.2 XS3.9 | length 14.1
  Bottom Layer w0.25: XS3.9 11.55,3.75 R23.2
NetR24_2: R24.2 XS3.12 | length 5.9
  Bottom Layer w0.25: XS3.12 23.8,5.6 23.8,2.7 23.6,2.5 R24.2
NFC_N: A1.52 C8.2 XP2.1 | length 16.8
  Top Layer w0.25: A1.52 38.75,56.6 39,56.35 40.114,56.35 ccw(c40.114,57.886) C8.2 ccw(c42.286,57.886) 42.286,56.35 47.709,56.35 ccw(c47.709,56.969) 48.146,56.531 cw(c49.23,55.448) 49.23,56.98 50.928,56.98 ccw(c50.928,59.52) 52.724,57.724 XP2.1
NFC_P: A1.51 C8.1 XP2.2 | length 16.8
  Top Layer w0.25: A1.51 38.75,55.6 39,55.85 40.114,55.85 cw(c40.114,54.314) C8.1 cw(c42.286,54.314) 42.284,55.85 cw(c42.286,54.314) 42.286,55.85 47.709,55.85 ccw(c47.709,56.969) 48.5,56.178 cw(c49.23,55.448) 49.23,56.48 50.928,56.48 cw(c50.928,53.94) 52.724,55.736 XP2.2
nRESET: A1.20 C7.2 DD2.19 R7.1 SB1.1 XP3.5 | length 60.4
  Top Layer w0.25: v1(19.75,39) 21.5,39 ; A1.20 21.5,39 ; SB1.1 32.25,13.25 33.525,14.525 v1(33.525,22.925) ; v1(33.5,39) 31.25,39 29.173,41.077 23.077,41.077 21.5,39.5 21.5,39
  Bottom Layer w0.2: DD2.19 33.35,22.75 v1(33.525,22.925) 33.9,23.3 33.9,38.1 33.5,38.5 v1(33.5,39)
  Bottom Layer w0.25: XP3.5 10.42,38.67 10.75,39 ; R7.1 C7.2 10.8,39.05 10.75,39 ; v1(19.75,39) 10.75,39
PA0: A1.21 DD2.7 R16.1 XP1.14 | length 49.6
  Top Layer w0.25: XP1.14 9.23,24.98 18.75,34.5 21,34.5 v1(22.5,36) A1.21
  Bottom Layer w0.2: v1(22.5,36) 25,36 26.75,34.25 26.75,23.65 27.15,23.25 DD2.7
  Bottom Layer w0.25: R16.1 19.75,40.75 22.5,38 v1(22.5,36)
PA1: A1.22 DD2.11 R11.1 XP1.15 | length 52.4
  Top Layer w0.25: XP1.15 7.44,22.44 19,34 21.5,34 23.5,36 A1.22 v1(23.5,40.25)
  Bottom Layer w0.2: v1(23.5,40.25) 26.05,40.25 28.8,37.5 28.8,25.6 29.25,25.15 DD2.11 ; R11.1 R11.1@23.5,41.55
  Bottom Layer w0.25: v1(23.5,40.25) R11.1
PA2: A1.23 DD2.10 R12.1 XP1.16 | length 54.3
  Top Layer w0.25: XP1.16 5.65,19.9 19.25,33.5 22,33.5 24.5,36 A1.23 v1(24.5,39.5)
  Bottom Layer w0.2: v1(24.5,39.5) 24.75,39.75 25.95,39.75 28.4,37.3 28.4,25.4 28.75,25.05 DD2.10
  Bottom Layer w0.25: R12.1 22.25,40.25 23,39.5 v1(24.5,39.5)
PA3: A1.24 DD2.9 XP1.17 | length 50.3
  Top Layer w0.25: XP1.17 3.86,17.36 19.5,33 22.5,33 25.5,36 A1.24 v1(25.5,39)
  Bottom Layer w0.2: v1(25.5,39) 26.1,39 28,37.1 28,25.2 28.25,24.95 DD2.9
PA4: A1.25 DD2.8 R17.1 XP1.18 | length 56.5
  Top Layer w0.25: XP1.18 3.82,14.82 4.5,15.5 4.5,17.25 19.75,32.5 23,32.5 v1(26.5,36) A1.25
  Bottom Layer w0.2: v1(26.5,36) 27.575,34.925 DD2.8
  Bottom Layer w0.25: R17.1 21,40.75 25.75,36 v1(26.5,36)
PA5: A1.26 DD2.26 XP2.18 | length 63.7
  Top Layer w0.25: v1(26,24.25) 31.5,24.25 32,23.75 v1(32,18.488) ; v1(26,34) 27.5,34 ; A1.26 27.5,34 ; XP2.18 52.68,14.82 51.5,16 51.5,17.75 50.5,18.75 50.5,21.25 40.5,31.25 32.5,31.25 29.75,34 27.5,34
  Bottom Layer w0.2: v1(26,24.25) v1(26,34) ; DD2.26 31.25,18.95 31.712,18.488 v1(32,18.488)
PA6: A1.28 DD2.13 R15.1 XP2.16 | length 53.5
  Top Layer w0.25: v1(29.5,39) A1.28 29.5,35.75 33,32.25 41,32.25 51.5,21.75 51.5,21 52.6,19.9 XP2.16
  Bottom Layer w0.2: v1(29.5,39) 29.5,29.75 30.6,28.65 30.6,26 30.4,25.8 30.4,25.2 30.25,25.05 DD2.13
  Bottom Layer w0.25: R15.1 26.25,40.75 28,39 v1(29.5,39)
PA7: A1.27 DD2.15 R14.1 XP2.17 | length 57.4
  Top Layer w0.25: v1(28.5,40.25) A1.27 28.5,36 32.75,31.75 40.75,31.75 51,21.5 51,19 52.64,17.36 XP2.17
  Bottom Layer w0.2: v1(28.5,40.25) 29.25,40.25 30.25,39.25 30.25,29.75 31.6,28.4 31.6,25.2 31.25,24.85 DD2.15
  Bottom Layer w0.25: R14.1 27.5,40.75 28,40.25 v1(28.5,40.25)
PB0: A1.47 R6.2 XP2.6 | length 43.6
  Top Layer w0.25: A1.47 39.65,51.6 45.95,45.3 XP2.6
  Bottom Layer w0.25: R6.2 45.75,25.25 46.5,26 46.5,41.25 50.55,45.3 XP2.6
PB1: A1.46 R5.2 XP2.7 | length 42.3
  Top Layer w0.25: A1.46 39.9,50.6 47.74,42.76 XP2.7
  Bottom Layer w0.25: R5.2 47,41 48.76,42.76 XP2.7
PB2: A1.45 XP2.8 | length 19.9
  Top Layer w0.25: A1.45 40.15,49.6 49.53,40.22 XP2.8
PB3: A1.44 XP2.9 | length 20.5
  Top Layer w0.25: A1.44 40.4,48.6 51.32,37.68 XP2.9
PB4: A1.48 XP2.5 | length 18
  Top Layer w0.25: A1.48 39.4,52.6 44.16,47.84 XP2.5
PB5: A1.49 XP2.4 | length 17.3
  Top Layer w0.25: A1.49 39.15,53.6 42.37,50.38 XP2.4
PC0: A1.41 DD2.24 XP2.12 | length 55.3
  Top Layer w0.25: A1.41 v1(38.5,45.6) 41.15,45.6 49.5,37.25 49.5,31.75 51.19,30.06 XP2.12
  Bottom Layer w0.2: DD2.24 34.05,20.25 35.9,22.1 35.9,39.3 39.5,42.9 39.5,44.6 v1(38.5,45.6)
PC1: A1.40 DD2.23 XP2.13 | length 55
  Top Layer w0.25: A1.40 v1(38.5,44.6) 41.35,44.6 49,36.95 49,29.75 51.23,27.52 XP2.13
  Bottom Layer w0.2: DD2.23 33.95,20.75 35.5,22.3 35.5,39.5 39.1,43.1 39.1,44 v1(38.5,44.6)
PC2: A1.39 DD2.22 XP2.14 | length 54.7
  Top Layer w0.25: A1.39 v1(38.5,43.6) 41.65,43.6 48.5,36.75 48.5,27.75 51.27,24.98 XP2.14
  Bottom Layer w0.2: DD2.22 33.85,21.25 35.1,22.5 35.1,39.7 38.5,43.1 v1(38.5,43.6)
PC3: A1.38 DD2.20 XP2.15 | length 54.3
  Top Layer w0.25: v1(35.5,42.6) A1.38 41.9,42.6 48,36.5 48,26 51.56,22.44 XP2.15
  Bottom Layer w0.2: DD2.20 33.65,22.25 34.3,22.9 34.3,40.1 35.5,41.3 v1(35.5,42.6)
PC4: A1.42 DD2.25 XP2.11 | length 56.1
  Top Layer w0.25: A1.42 v1(38.5,46.6) 40.9,46.6 50,37.5 50,34 51.4,32.6 XP2.11
  Bottom Layer w0.2: DD2.25 33.975,19.575 36.3,21.9 36.3,39.1 39.9,42.7 39.9,45.2 v1(38.5,46.6)
PC5: A1.43 DD2.21 XP2.10 | length 52.2
  Top Layer w0.25: v1(35.5,47.6) A1.43 40.65,47.6 50.75,37.5 50.75,35.75 51.36,35.14 XP2.10
  Bottom Layer w0.2: DD2.21 33.75,21.75 34.7,22.7 34.7,39.9 36.25,41.45 36.25,46.85 v1(35.5,47.6)
PD4: A1.5 DD2.17 XP1.1 | length 53.9
  Top Layer w0.25: XP1.1 5.75,58 12.15,51.6 A1.5 v1(19.5,51.6)
  Bottom Layer w0.2: v1(19.5,51.6) 20.4,51.6 32.398,39.602 32.398,25.1 32.425,25.073 DD2.17
PD5: A1.6 DD2.16 XP1.2 | length 51.8
  Top Layer w0.25: XP1.2 7.29,55.46 12.15,50.6 A1.6 v1(19.5,50.6)
  Bottom Layer w0.2: v1(19.5,50.6) 20.9,50.6 32,39.5 32,25.1 31.75,24.85 DD2.16
PD6: A1.7 XP1.3 | length 17.4
  Top Layer w0.25: XP1.3 8.93,52.92 12.25,49.6 A1.7
PD7: A1.8 XP1.4 | length 16.7
  Top Layer w0.25: XP1.4 10.62,50.38 12.4,48.6 A1.8
PE0: A1.15 XP1.10 | length 18.7
  Top Layer w0.25: XP1.10 8.39,35.14 14.85,41.6 A1.15
PE1: A1.14 XP1.9 | length 18.4
  Top Layer w0.25: XP1.9 5.07,37.68 5.5,37.25 9.75,37.25 15.1,42.6 A1.14
PE2: A1.13 XP1.8 | length 17.6
  Top Layer w0.25: XP1.8 5.03,40.22 5.25,40 9.75,40 13.35,43.6 A1.13
PE3: A1.12 R8.1 XP1.7 XP3.2 | length 21
  Top Layer w0.25: XP1.7 6.94,42.76 7.2,42.5 9.5,42.5 v1(11.6,44.6) A1.12
  Bottom Layer w0.25: XP3.2 R8.1 10.8,45.4 v1(11.6,44.6)
PE4: A1.11 R9.1 XP1.6 XP3.3 | length 19.8
  Top Layer w0.25: XP1.6 7.2,45.3 7.5,45 8.75,45 ; XP3.3 8.75,45 ; A1.11 10.6,45.6 10,45 8.75,45
  Bottom Layer w0.25: XP3.3 R9.1@10.9,43.75
PE5: A1.10 XP1.5 | length 16.5
  Top Layer w0.25: XP1.5 6.41,47.84 6.75,47.5 9.75,47.5 10.65,46.6 A1.10
RF_IO: A1.2
RX_N: DD2.30 R25.1 XS3.8 | length 22.9
  Top Layer w0.2: XS3.8 R25.1
  Bottom Layer w0.2: XS3.8 19.7,18.9 18.324,17.524 ccw(c19.349,16.5) 17.9,16.5 17.9,16.45 ccw(c19.8,16.45) 19.8,14.55 ccw(c19.8,16) 21.25,16 cw(c22.075,16) 22.075,16.825 28.3,16.825 ccw(c28.3,17.75) 29.225,17.75 29.225,18.675 cw(c29.25,18.675) 29.25,18.7 DD2.30
RX_P: DD2.31 R22.1 XS3.7 | length 22.9
  Top Layer w0.2: XS3.7 R22.1
  Bottom Layer w0.2: XS3.7 19.175,15.425 ccw(c19.6,15.425) 19.6,15 19.8,15 ccw(c19.8,16) 20.8,16 cw(c22.075,16) 22.075,17.275 ccw(c22.075,17.575) 22.375,17.575 22.375,18.039 cw(c22.675,18.039) 22.675,18.339 cw(c22.675,18.039) 22.975,18.039 22.975,17.575 ccw(c23.275,17.575) 23.275,17.275 ccw(c23.275,17.575) 23.575,17.575 23.575,18.039 cw(c23.875,18.039) 23.875,18.339 cw(c23.875,18.039) 24.175,18.039 24.175,17.575 ccw(c24.475,17.575) 24.475,17.275 24.9,17.275 28.3,17.275 ccw(c28.3,17.75) 28.775,17.75 28.775,18.675 ccw(c28.75,18.675) 28.75,18.7 DD2.31
TX_N: DD2.28 R20.1 XS3.2 | length 32.3
  Top Layer w0.2: XS3.2 R20.1
  Bottom Layer w0.2: XS3.2 12.08,18.9 10.704,17.524 ccw(c11.729,16.5) 10.28,16.5 10.28,16.45 ccw(c12.18,16.45) 12.18,14.55 13.155,14.55 cw(c13.155,13.355) 14,14.2 14.074,14.126 ccw(c16.188,16.24) 16.188,13.25 19.811,13.25 ccw(c19.811,16.24) 21.926,14.126 22.5,14.7 cw(c23.828,13.372) 23.828,15.25 28.2,15.25 ccw(c28.2,17.275) 30.225,17.275 30.225,18.675 cw(c30.25,18.675) 30.25,18.7 DD2.28
TX_P: DD2.29 R18.1 XS3.1 | length 32
  Top Layer w0.2: XS3.1 R18.1
  Bottom Layer w0.2: XS3.1 11.555,15.425 ccw(c11.98,15.425) 11.98,15 13.155,15 cw(c13.155,13.355) 14.318,14.518 14.392,14.444 ccw(c16.189,16.24) 16.189,13.7 16.4,13.7 ccw(c16.4,14) 16.7,14 16.7,14.462 cw(c17,14.462) 17,14.762 cw(c17,14.462) 17.3,14.462 17.3,14 ccw(c17.6,14) 17.6,13.7 ccw(c17.6,14) 17.9,14 17.9,14.324 cw(c18.2,14.324) 18.2,14.624 cw(c18.2,14.324) 18.5,14.324 18.5,14 ccw(c18.8,14) 18.8,13.7 19.2,13.7 19.811,13.7 ccw(c19.811,16.24) 21.608,14.444 22.182,15.018 cw(c23.828,13.372) 23.828,15.7 28.2,15.7 ccw(c28.2,17.275) 29.775,17.275 29.775,18.675 ccw(c29.75,18.675) 29.75,18.7 DD2.29
USB_N: A1.30 FV1.3 XS1.2 | length 40.4
  Top Layer w0.25: A1.30 31.5,36.3 ccw(c33,36.3) 33,34.8 36.7,34.8 cw(c36.7,34.1) 37.4,34.1 37.4,33.483 cw(c36.717,33.483) v1(37.2,33) ; XS1.2 32.35,4.405 ccw(c31.155,4.405) 32,5.25 cw(c32.604,5.854) 31.75,5.854 cw(c32.942,5.854) 32.099,6.696 FV1.3 ccw(c32.109,7.189) 32.45,7.189 32.45,7.908 cw(c34.495,7.908) 33.049,9.354 33.139,9.444 ccw(c31.664,10.919) 33.75,10.919 33.75,12.293 cw(c35.457,12.293) 34.25,13.5 ccw(c33.646,14.104) 34.5,14.104 34.5,17.241 cw(c37.54,17.241) 35.39,19.39 36.656,20.656 ccw(c34.86,22.452) 37.4,22.452 37.4,23.417 ccw(c36.717,23.417) v1(37.2,23.9)
  Bottom Layer w0.25: v1(37.2,23.9) ccw(c36.717,24.383) 37.4,24.383 37.4,32.517 ccw(c36.717,32.517) v1(37.2,33)
USB_P: A1.31 FV1.1 XS1.3 | length 39.9
  Top Layer w0.25: A1.31 32.5,36.3 ccw(c33.5,36.3) 33.5,35.3 36.7,35.3 cw(c36.7,34.1) 37.9,34.1 37.9,33.483 ccw(c38.583,33.483) v1(38.1,33) ; XS1.3 33,4.405 cw(c34.195,4.405) 33.35,5.25 ccw(c32.746,5.854) 33.6,5.854 ccw(c32.408,5.854) 33.251,6.696 FV1.1@33,6.947 ; FV1.1 cw(c33.291,7.189) 32.95,7.189 32.95,7.908 cw(c34.495,7.908) 33.402,9 33.493,9.09 ccw(c31.664,10.919) 34.25,10.919 34.25,12.293 cw(c35.457,12.293) 34.604,13.146 ccw(c33.646,14.104) 35,14.104 35,17.241 cw(c37.54,17.241) 35.744,19.037 37.01,20.302 ccw(c34.86,22.452) 37.9,22.452 37.9,23.417 cw(c38.583,23.417) v1(38.1,23.9)
  Bottom Layer w0.25: v1(38.1,23.9) cw(c38.583,24.383) 37.9,24.383 37.9,32.517 cw(c38.583,32.517) v1(38.1,33)
USBD_N: DD1.5 XS2.2 | length 27.4
  Top Layer w0.25: v1(45.2,5.8) cw(c44.838,5.438) 45.35,5.438 XS2.2
  Bottom Layer w0.25: DD1.5 41.25,18.75 41.275,18.725 41.275,18.593 ccw(c42.118,18.593) 42.118,17.75 49.082,17.75 cw(c49.082,16.582) 50.25,16.582 50.25,8.868 cw(c49.082,8.868) 49.082,7.7 46.875,7.7 ccw(c46.875,6.25) 45.425,6.25 45.425,6.025 cw(c45.2,6.025) v1(45.2,5.8)
USBD_P: DD1.4 XS2.3 | length 27.4
  Top Layer w0.25: XS2.3 46,5.559 cw(c46.341,5.559) v1(46.1,5.8)
  Bottom Layer w0.25: DD1.4 41.75,18.75 41.725,18.725 ccw(c42.25,18.725) 42.25,18.2 49.082,18.2 cw(c49.082,16.582) 50.7,16.582 50.7,8.868 cw(c49.082,8.868) 49.082,7.25 46.875,7.25 ccw(c46.875,6.25) 45.875,6.25 45.875,6.025 ccw(c46.1,6.025) v1(46.1,5.8)
VCC3P3: A1.9 A1.33 A1.34 A1.36 C15.2 C22.2 C23.2 C24.2 C25.2 DD2.12 KT4.1 L3.1 L4.2 L5.2 R7.2 R8.2 R9.2 R10.2 R11.2 R12.2 R14.2 R15.2 R16.2 R17.2 R31.2 XP1.19 XP2.19 XP3.1 | length 106.9
  Top Layer w0.25: R31.2 C22.2 42.75,18 43.5,18.75 C24.2
  Top Layer w0.4: 28.75,29 28.75,28.25 29.75,27.25 v1(29.75,25.5) ; 32,29 32,25 32.75,24.25 v1(32.75,15) ; v1(33.1,28.5) 33.1,29 ; KT4.1 39.5,28.25
  Top Layer w0.6: XP3.1 10.87,48.83 12.1,47.6 A1.9 23.5,47.6 ; 16.5,26.5 17,26 L3.1 ; v1(23.5,43.75) 23.5,47.6 ; A1.33 34.5,38.6 ; A1.36 34.5,40.6 ; C25.2 A1.34 34.5,38.6 ; 45.25,20.75 47.75,20.75 48.75,19.75 48.75,14.75 51.22,12.28 XP2.19 ; 23.5,47.6 28.4,47.6 34.5,41.5 34.5,40.6 ; 34.5,38.6 34.5,40.6
  Bottom Layer w0.2: DD2.12 v1(29.75,25.5) C15.2 ; R10.2 v1(33.1,28.5)
  Bottom Layer w0.25: XP3.1 10.92,48.83 12.2,47.55 R8.2 R9.2 R7.2
  Bottom Layer w0.4: R16.2 R17.2 R12.2 R11.2 ; v1(23.5,43.75) R11.2 ; R14.2 R15.2 R11.2 ; v1(32.75,15) L4.2
  other v1: 15,24.25 15.75,24.25 15,25 15.75,25 39,29.25 39.75,29.25 39,30 39.75,30 39,37 39.75,37 39,37.75 39.75,37.75
VCC5P0: C4.2 C5.2 C17.2 C18.2 DA1.2 DD1.7 DD1.8 KT3.1 L1.2 L2.2 R27.1 VD1.1 XP4.1 | length 34.3
  Top Layer w0.2: R27.1 35.9,12.8 35.6,12.5 35.6,10.8 35.9,10.5 v1(39,10.5)
  Top Layer w0.25: KT3.1 38.85,7.75
  Top Layer w0.6: 43.5,7.65 51.6,7.65 53,6.25 XP4.1
  Bottom Layer w0.25: v1(39,10.5) 39,12.5 37.95,13.55 C4.2 C5.2 ; DD1.8 38.5,20.5 37.95,19.95 C5.2 ; DD1.7 39.15,19.65 38.75,19.25 C5.2
  Bottom Layer w0.4: v1(42.75,8.75) VD1.1